# Altium PCB 十六路输入.PcbDoc (part 1 of 3)
Units mm, origin at the board's own origin, x right, y up, seen from the top; angles counter-clockwise.
Board outline 122.4 x 87.4 mm, 2 copper layers (Top Layer, Bottom Layer); 111 components, 112 nets, 343 pads, 40 vias.
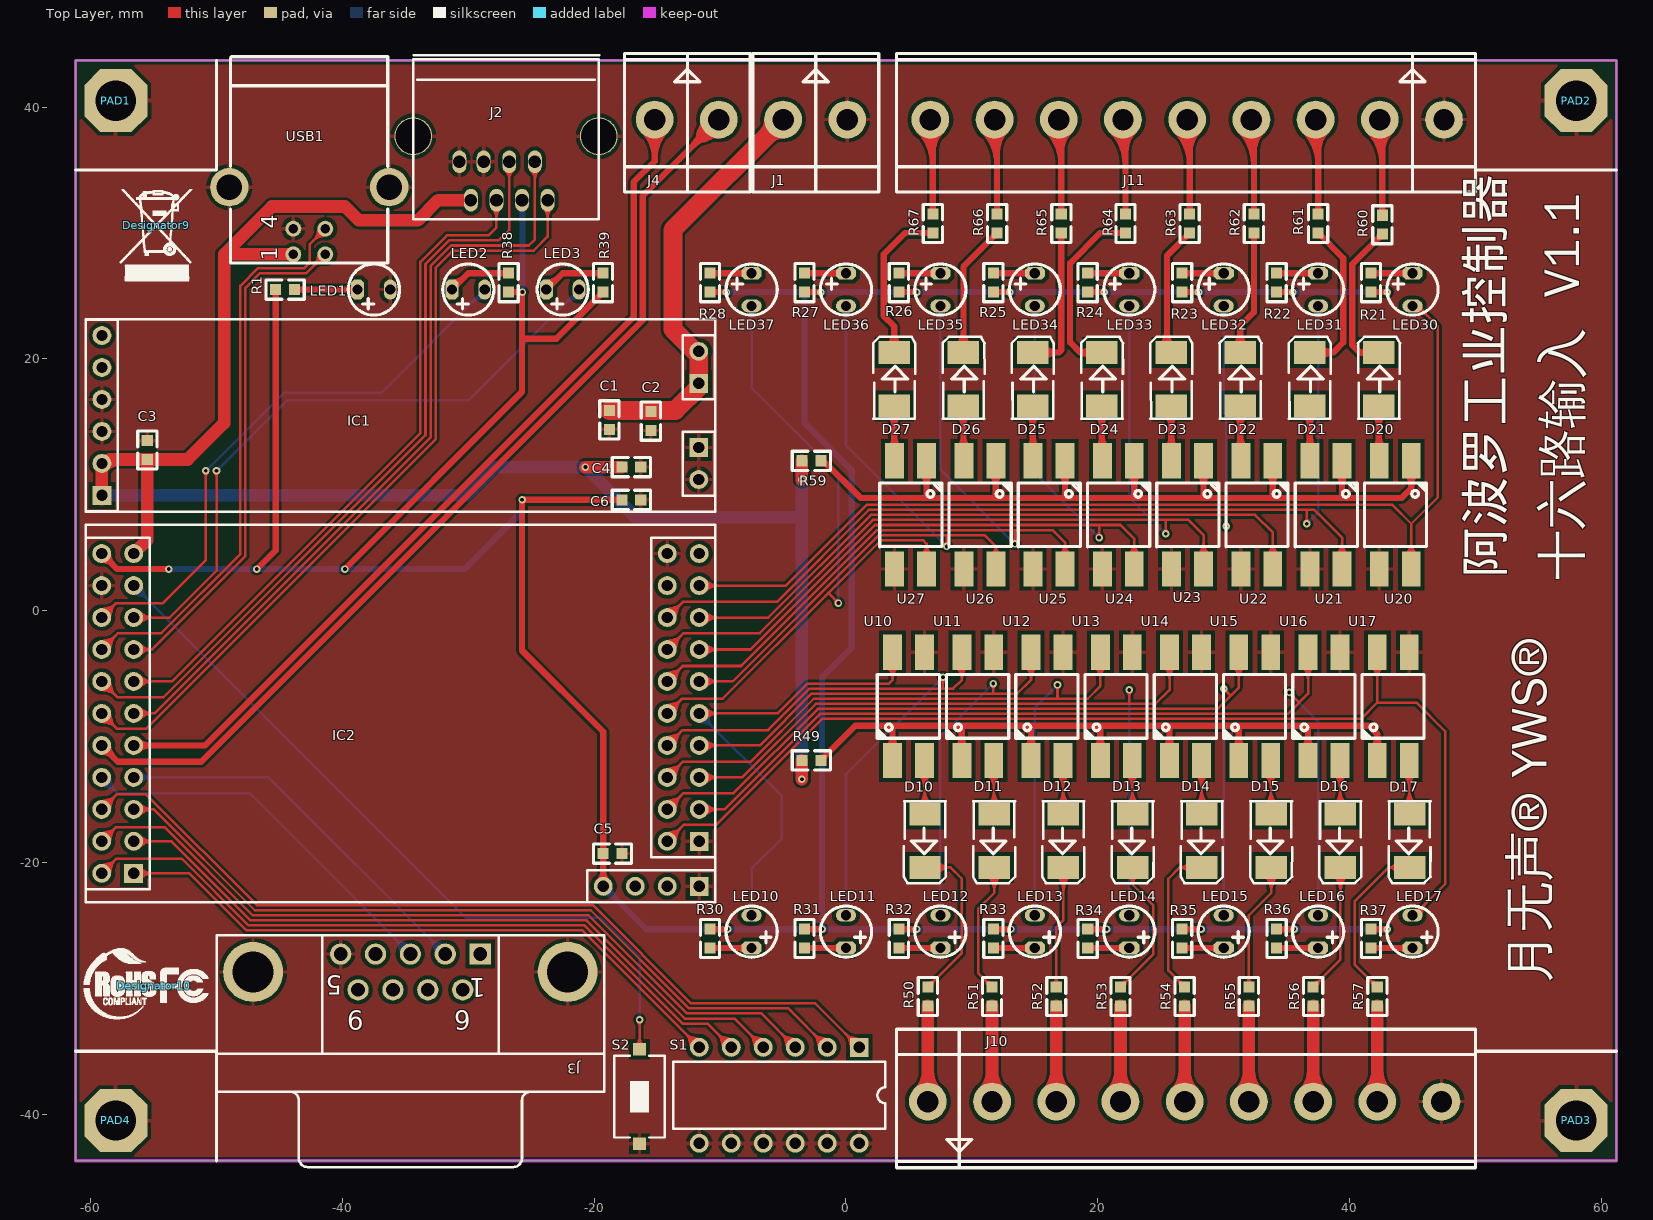
[diagram p0: Top Layer view]
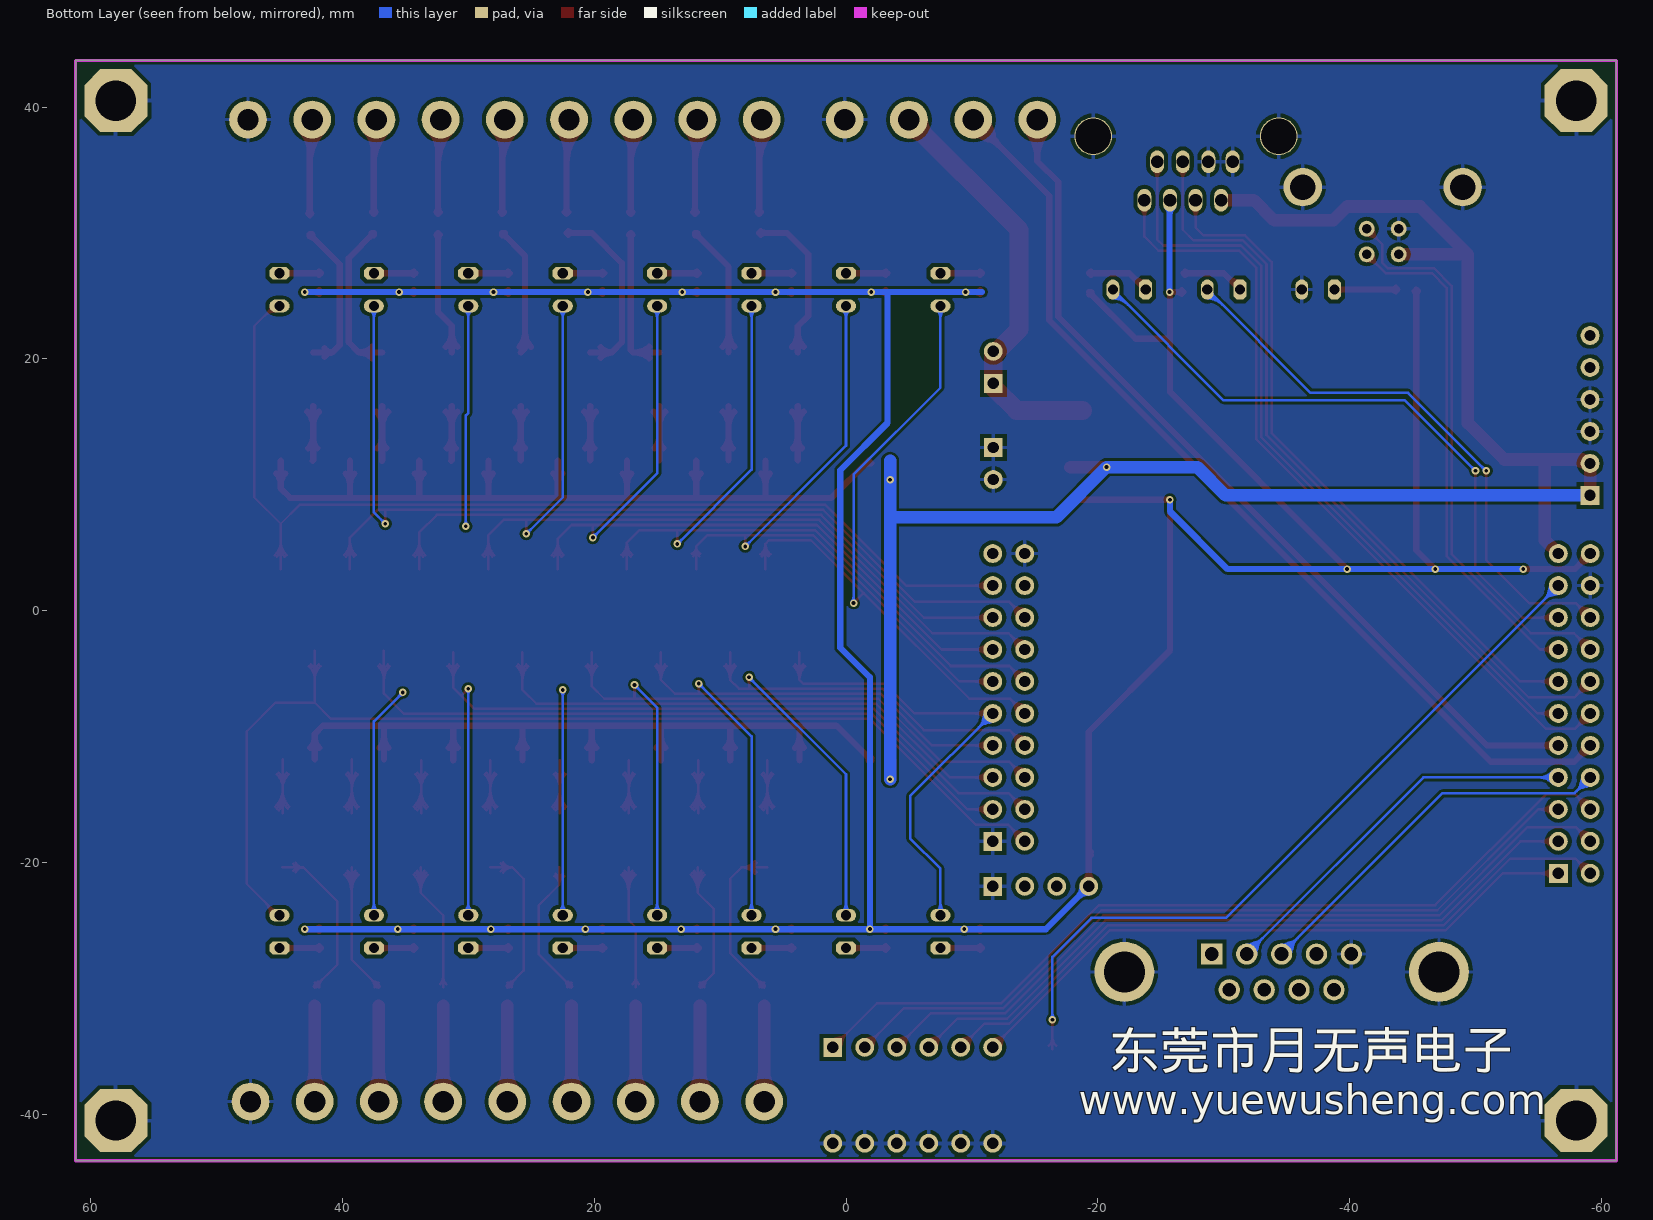
[diagram p1: Bottom Layer view, seen from below]

## Layer stack, top to bottom
Top Layer: signal copper 0.0356
Dielectric: dielectric 0.32, FR-4, Dk 4.8
Bottom Layer: signal copper 0.0356

## Board outline
-61.2,-43.7 61.2,-43.7 61.2,43.7 -61.2,43.7

## Design rules (kind name [scope] priority, off if disabled: settings)
Clearance [(InPadClass('All Pads')) vs InPolygon] p1: gap=0.3
Clearance Clearance_1 [All] p2: gap=0.2
ComponentClearance [All] p1 off: gap=0.254 collisioncheckmode=3 verticalgap=0.254 showdistances=FALSE
PlaneConnect [All] p1: planeconnectstyle=Relief reliefexpansion=0 reliefentries=4 reliefconductorwidth=0.3 reliefairgap=0.508
PolygonConnect PolygonConnect_1 [All vs IsComponentPad] p1: connectstyle=Relief reliefconductorwidth=0.3 reliefentries=4 polygonreliefangle="90 Angle" airgapwidth=0.3
PolygonConnect [All] p2: connectstyle=Direct reliefconductorwidth=0.3 reliefentries=4 polygonreliefangle="90 Angle" airgapwidth=0.3
RoomDefinition 2、十六路输入 [InComponentClass('2、十六路输入')] p1: confinementstyle=ConfineIn formatcopy=TRUE lockcomponents=FALSE outline -12,23.5 -12,28 3.5,28 3.5,46.6 62,46.6 62,-46.8 3.5,-46.8 3.5,-28 -12,-28 -12,-23.5 -9,-23.5 -9,23.5
RoomDefinition 公共电路 [InComponentClass('公共电路')] p2: confinementstyle=ConfineIn formatcopy=TRUE lockcomponents=FALSE outline -62,-44.5 3.5,-44.5 3.5,-43.7 61.2,-43.7 61.2,43.7 50,43.7 50,35 61.2,35 61.2,-35 50,-35 50,-43.7 3.5,-43.7 3.5,-28 -12,-28 -12,-23.5 -9.5,-23.5 -9.5,23.5 -12,23.5 -12,28 3.5,28 3.5,44.5 -62,44.5
RoutingVias [All] p1: holewidth=0.3 width=0.6 viastyle="Through Hole" minholewidth=0.3 minwidth=0.6 maxholewidth=0.3 maxwidth=0.6
SolderMaskExpansion [All] p1: expansion=0.102
Width [All] p1: maxlimit=2 minlimit=0.16 preferedwidth=0.2 minimp=50.000000 maximp=50.000000 favimp=50.000000
26 further rules are at their usual default settings.

## Classes and differential pairs
component class 2、十六路输入: D10 D11 D12 D13 D14 D15 D16 D17 D20 D21 D22 D23 D24 D25 D26 D27 J10 J11 LED10 LED11 LED12 LED13 LED14 LED15 LED16 LED17 LED30 LED31 LED32 LED33 LED34 LED35 LED36 LED37 R21 R22 R23 R24 R25 R26 R27 R28 R30 R31 R32 R33 R34 R35 R36 R37 R49 R50 R51 R52 R53 R54 R55 R56 R57 R59 R60 R61 R62 R63 R64 R65 R66 R67 U10 U11 U12 U13 U14 U15 U16 U17 U20 U21 U22 U23 U24 U25 U26 U27
component class 公共电路: C1 C2 C3 C4 C5 C6 Designator9 Designator10 IC1 IC2 J1 J2 J3 J4 LED1 LED2 LED3 PAD1 PAD2 PAD3 PAD4 R1 R38 R39 S1 S2 usb1

## Components (designator, comment, footprint, x,y, rotation, side; value= is the part's Value field where it differs from the comment)
C1 "104" 0603A -18.8,15.9 r270 top
C2 "104" 0603A -15.5,15.8 r270 top
C3 "104" 0603A -55.5,12 r90 top
C4 "104" 0603A -17.8,11.4 r0 top
C5 "104" 0603A -19.3,-19.3 r0 top
C6 "104" 0603A -17.8,8.8 r0 top
D10 "4148" 贴片二极管 6.2,-21.7 r270 top
D11 "4148" 贴片二极管 11.7,-21.7 r270 top
D12 "4148" 贴片二极管 17.2,-21.7 r270 top
D13 "4148" 贴片二极管 22.7,-21.7 r270 top
D14 "4148" 贴片二极管 28.2,-21.7 r270 top
D15 "4148" 贴片二极管 33.7,-21.7 r270 top
D16 "4148" 贴片二极管 39.2,-21.7 r270 top
D17 "4148" 贴片二极管 44.7,-21.7 r270 top
D20 "4148" 贴片二极管 42.4,21.8 r90 top
D21 "4148" 贴片二极管 36.9,21.8 r90 top
D22 "4148" 贴片二极管 31.4,21.8 r90 top
D23 "4148" 贴片二极管 25.9,21.8 r90 top
D24 "4148" 贴片二极管 20.4,21.8 r90 top
D25 "4148" 贴片二极管 14.9,21.8 r90 top
D26 "4148" 贴片二极管 9.4,21.8 r90 top
D27 "4148" 贴片二极管 3.9,21.8 r90 top
Designator9 "" HS -54.8,30.6 r0 top
Designator10 "" fc -55,-29.8 r0 top
IC1 "扩展模块电源板" 扩展模块电源板 -35.4,15.5 r180 top
IC2 "扩展模块核心板" 扩展模块核心板 -35.4,-8.2 r0 top
J1 "CON2" CON2*5.1 0.1,39 r0 top
J2 "CON8" "od-rj45 - duplicate" -23.7,32.6 r180 top
J3 "D Connector 9" DSUB1.385-2H9 -34.6,-38.2 r180 top
J4 "CON2" CON2*5.1 -10.1,39 r0 top
J10 "CON9" CON9*5.1 6.5,-39 r180 top
J11 "CON9" CON9*5.1 47.5,39 r0 top
LED1 "LED" LED2.5 -37.5,25.5 r180 top
LED2 "LED" LED2.5 -30,25.5 r180 top
LED3 "LED" LED2.5 -22.5,25.5 r180 top
LED10 "LED" LED2.5 -7.5,-25.5 r270 top (schematic designator LED18)
LED11 "LED" LED2.5 0,-25.5 r270 top
LED12 "LED" LED2.5 7.5,-25.5 r270 top
LED13 "LED" LED2.5 15,-25.5 r270 top
LED14 "LED" LED2.5 22.5,-25.5 r270 top
LED15 "LED" LED2.5 30,-25.5 r270 top
LED16 "LED" LED2.5 37.5,-25.5 r270 top
LED17 "LED" LED2.5 45,-25.5 r270 top
LED30 "LED" LED2.5 45,25.5 r90 top
LED31 "LED" LED2.5 37.5,25.5 r90 top
LED32 "LED" LED2.5 30,25.5 r90 top
LED33 "LED" LED2.5 22.5,25.5 r90 top
LED34 "LED" LED2.5 15,25.5 r90 top
LED35 "LED" LED2.5 7.5,25.5 r90 top
LED36 "LED" LED2.5 0,25.5 r90 top
LED37 "LED" LED2.5 -7.5,25.5 r90 top
PAD1 "PAD" PAD -58,40.5 r0 top
PAD2 "PAD" PAD 58,40.5 r0 top
PAD3 "PAD" PAD 58,-40.5 r0 top
PAD4 "PAD" PAD -58,-40.5 r0 top
R1 "160" 0603A -45.3,25.5 r0 top
R21 "160R" 0603A 41.7,25.3 r90 top
R22 "160R" 0603A 34.2,25.3 r90 top
R23 "160R" 0603A 26.7,25.3 r90 top
R24 "160R" 0603A 19.2,25.3 r90 top
R25 "160R" 0603A 11.7,25.3 r90 top
R26 "160R" 0603A 4.2,25.3 r90 top
R27 "160R" 0603A -3.3,25.3 r90 top
R28 "160R" 0603A -10.8,25.3 r90 top
R30 "160R" 0603A -10.8,-25.3 r270 top
R31 "160R" 0603A -3.3,-25.3 r270 top
R32 "160R" 0603A 4.2,-25.3 r270 top
R33 "160R" 0603A 11.7,-25.3 r270 top
R34 "160R" 0603A 19.2,-25.3 r270 top
R35 "160R" 0603A 26.7,-25.3 r270 top
R36 "160R" 0603A 34.2,-25.3 r270 top
R37 "160R" 0603A 41.7,-25.3 r270 top
R38 "160" 0603A -26.8,25.3 r90 top
R39 "160" 0603A -19.3,25.3 r90 top
R49 "0" 0603A -2,-11.9 r180 top
R50 "160R" 0603A 6.5,-29.9 r270 top
R51 "160R" 0603A 11.6,-29.9 r270 top
R52 "160R" 0603A 16.7,-29.9 r270 top
R53 "160R" 0603A 21.8,-29.9 r270 top
R54 "160R" 0603A 26.9,-29.9 r270 top
R55 "160R" 0603A 32,-29.9 r270 top
R56 "160R" 0603A 37.1,-29.9 r270 top
R57 "160R" 0603A 42.2,-29.9 r270 top
R59 "0" 0603A -2,11.9 r180 top
R60 "160R" 0603A 42.6,29.9 r90 top
R61 "2.4k" 0603A 37.5,30 r90 top
R62 "160R" 0603A 32.4,30 r90 top
R63 "160R" 0603A 27.3,30 r90 top
R64 "160R" 0603A 22.2,30 r90 top
R65 "160R" 0603A 17.1,30 r90 top
R66 "160R" 0603A 12,30 r90 top
R67 "160R" 0603A 6.9,30 r90 top
S1 "SW DIP-6" DIP-12/SW -5.3,-38.5 r180 top
S2 "RESRT" SW-PB2 -16.4,-38.6 r270 top
U10 "TLP521-1" PC817 3.7,-11.6 r90 top
U11 "TLP521-1" PC817 9.2,-11.6 r90 top
U12 "TLP521-1" PC817 14.7,-11.6 r90 top
U13 "TLP521-1" PC817 20.2,-11.6 r90 top
U14 "TLP521-1" PC817 25.7,-11.6 r90 top
U15 "TLP521-1" PC817 31.2,-11.6 r90 top
U16 "TLP521-1" PC817 36.7,-11.6 r90 top
U17 "TLP521-1" PC817 42.2,-11.6 r90 top
U20 "TLP521-1" PC817 44.9,11.6 r270 top
U21 "TLP521-1" PC817 39.4,11.6 r270 top
U22 "TLP521-1" PC817 33.9,11.6 r270 top
U23 "TLP521-1" PC817 28.4,11.6 r270 top
U24 "TLP521-1" PC817 22.9,11.6 r270 top
U25 "TLP521-1" PC817 17.4,11.6 r270 top
U26 "TLP521-1" PC817 11.9,11.6 r270 top
U27 "TLP521-1" PC817 6.4,11.6 r270 top
USB1 "USB" USB-B3 -43.9,28.3 r90 top

## Footprints (in the part's own frame and the unit in brackets; to place one, negate y for a bottom-side part, rotate by r counter-clockwise, add the part's x,y. Pads: shape width x height; smd on the part's side, far side on the other; paste and mask are expansions set on the pad)
0603A [mm]
  rect 0.88x0.88 smd: 1(0,0) 2(1.5,0)
  silkscreen extent -0.76,-0.76 2.26,0.76
CON2*5.1 [mm]
  round 3 hole 1.7: 1(0,0) 2(-5.1,0)
  silkscreen extent -7.5,-5.75 2.5,5.25
CON9*5.1 [mm]
  round 3 hole 1.7: 1(0,0) 2(-5.1,0) 3(-10.2,0) 4(-15.3,0) 5(-20.4,0) 6(-25.5,0) 7(-30.6,0) 8(-35.7,0) 9(-40.8,0)
  silkscreen extent -43.5,-5.75 2.5,5.25
DIP-12/SW [mm] "DIP Switch; 12 Leads"
  rect 1.5x1.5 hole 0.9: 1(-6.35,-3.81)
  round 1.5 hole 0.9: 2(-3.81,-3.81) 3(-1.27,-3.81) 4(1.27,-3.81) 5(3.81,-3.81) 6(6.35,-3.81) 7(6.35,3.81) 8(3.81,3.81) 9(1.27,3.81) 10(-1.27,3.81) 11(-3.81,3.81) 12(-6.35,3.81)
  silkscreen extent -8.43,-2.65 8.41,2.65
DSUB1.385-2H9 [mm] "Connector; D Subminiature; 9 Position; Right Angle; Pitch 1.385 mm"
  rect 1.69x1.69 hole 1.09: 1(-5.54,-10.92)
  round 1.69 hole 1.09: 2(-2.77,-10.92) 3(0,-10.92) 4(2.77,-10.92) 5(5.54,-10.92) 6(-4.155,-8.08) 7(-1.385,-8.08) 8(1.385,-8.08) 9(4.155,-8.08)
  round 4.76 hole 3.26: 10(-12.495,-9.5) 11(12.495,-9.5)
  silkscreen extent -15.4,-12.4 15.4,6
fc [mm]
  silkscreen extent -5.53,-2.62 4.36,3
HS [mm]
  silkscreen extent -2.87,-4.39 2.87,2.87
LED2.5 [mil]
  oct 40x63 hole 32: A(51.18,0)
  oval 40x63 hole 32: K(-51.18,0)
  silkscreen extent -80,-80 80,80
"od-rj45 - duplicate" [mm]
  oval 1.1x1.8 hole 1: 1(0,0) 2(1.016,-3.048) 3(2.032,0) 4(3.048,-3.048) 5(4.064,0) 6(5.08,-3.048) 7(6.096,0) 8(7.012,-3.048)
  round 3 hole 2.8: 8(-4.064,-5.08) 8(10.668,-5.08)
  silkscreen extent -4.1,-11.53 10.67,1.52
PAD [mm]
  oct 5x5 hole 3.2: 1(0,0)
PC817 [mm]
  rect 2.8x1.5 smd: 1(-0.3,0) 2(-0.3,-2.54) 3(8.3,-2.54) 4(8.3,0)
  silkscreen extent 1.46,-3.72 6.53,1.22
SW-PB2 [mm]
  rect 1x1 smd: 1(-3.75,0) 2(3.75,0)
  silkscreen extent -3.25,-2 3.25,2
USB-B3 [mil]
  round 50 hole 30: 1(0,0) 2(0,-100) 3(80,-100) 4(80,0)
  round 120 hole 80: 5(210,200) 6(210,-300)
  silkscreen extent -28,-295 618,197
扩展模块核心板 [mm]
  rect 1.5x1.5 hole 0.9: 1(-21.18,-12.67) 42(23.74,-10.13) 43(23.74,-13.7)
  round 1.5 hole 0.9: 2(-23.72,-12.67) 3(-21.18,-10.13) 4(-23.72,-10.13) 5(-21.18,-7.59) 6(-23.72,-7.59) 7(-21.18,-5.05) 8(-23.72,-5.05) 9(-21.18,-2.51) 10(-23.72,-2.51) 11(-21.18,0.03) 12(-23.72,0.03) 13(-21.18,2.57) 14(-23.72,2.57) 15(-21.18,5.11) 16(-23.72,5.11) 17(-21.18,7.65) 18(-23.72,7.65) 19(-21.18,10.19) 20(-23.72,10.19) 21(-21.18,12.73) 22(-23.72,12.73) 23(21.2,12.73) 24(23.74,12.73) 25(21.2,10.19) 26(23.74,10.19) 27(21.2,7.65) 28(23.74,7.65) 29(21.2,5.11) 30(23.74,5.11) 31(21.2,2.57) 32(23.74,2.57) 33(21.2,0.03) 34(23.74,0.03) 35(21.2,-2.51) 36(23.74,-2.51) 37(21.2,-5.05) 38(23.74,-5.05) 39(21.2,-7.59) 40(23.74,-7.59) 41(21.2,-10.13) 44(21.2,-13.7) 45(18.66,-13.7) 46(16.12,-13.7)
  silkscreen extent -24.99,-14.97 25.01,15.03
扩展模块电源板 [mm]
  round 1.5 hole 0.9: 1(-23.7,-5.09) 2(-23.7,5.09) 3(23.7,3.81) 4(23.7,-1.27) 4(23.7,1.27) 5(23.7,-6.35) 5(23.7,-3.81)
  rect 1.5x1.5 hole 0.9: 1(-23.7,-2.55) 2(-23.7,2.55) 3(23.7,6.35)
  silkscreen extent -25,-7.65 25,7.65
贴片二极管 [mm]
  rect 1.8x2.5 smd: A(-5.55,0.075) K(-1.3,0.075)
  silkscreen extent -6.58,-1.61 -0.05,1.73

## Part data
C1 C2 C3 C4 C5 C6: library part CAP, "Capacitor"
D10 D11 D12 D13 D14 D15 D16 D17 D20 D21 D22 D23 D24 D25 D26 D27: library part 二极管
Designator9 Designator10: library part PAD
J3: "Receptacle Assembly, 9 Position, Right Angle"
R1 R38 R39: library part RES2
R21 R22 R23 R24 R25 R26 R27 R28 R30 R31 R32 R33 R34 R35 R36 R37 R49 R50 R51 R52 R53 R54 R55 R56 R57 R59 R60 R61 R62 R63 R64 R65 R66 R67: library part Res2, "Resistor"
S1: "DIP Switch, 6 Position, SPST"
S2: library part SW-PB
U10 U11 U12 U13 U14 U15 U16 U17 U20 U21 U22 U23 U24 U25 U26 U27: "Single NPN PhotoTransistor OptoCoupler."
USB1: library part "HEADER 3X2"

## Via types
v1: diameter 0.6, hole 0.3, Top Layer to Bottom Layer, 40 vias

## Nets (pads, with @x,y where several pads share a name; then routed paths per layer and width w, separated by ;. In a path a pad name is that pad's centre, name@x,y a point inside that pad or via, vN(x,y) a via of type N, cw(c..) or ccw(c..) an arc to the next point about the centre after c; other vN are vias at no path point)
485A: IC2.10 J4.1 | length 102
  Top Layer w0.5: IC2.10@-59.12,-10.41 IC2.10@-58.97,-10.56 ; -58.49,-11.379 cw(c-58.264,-10.535) IC2.10@-59.12,-10.71 ; -58.451,-11.34 ccw(c-59.295,-11.566) IC2.10@-59.12,-10.71 ; -11.667,37.816 cw(c-9.752,37.303) J4.1@-10.15,39.245 ; -11.284,37.433 ccw(c-11.797,39.348) J4.1@-9.855,38.95 ; J4.1@-10.1,39 -16.15,32.95 -16.15,23.06 -51.21,-12 -57.83,-12 IC2.10@-59.12,-10.71 ; -58.266,-11.564 cw(c-57.413,-10.71) -58.62,-10.71 ccw(c-57.413,-10.71) -58.266,-11.564 ; -58.266,-11.564 ccw(c-59.12,-12.417) -59.12,-11.21 cw(c-59.12,-12.417) -58.266,-11.564 ; -12.234,36.866 cw(c-10.1,34.732) -10.1,37.75 ccw(c-10.1,34.732) -12.234,36.866 ; -12.234,36.866 ccw(c-14.368,39) -11.35,39 cw(c-14.368,39) -12.234,36.866 ; -11.38,37.72 cw(c-10.1,36.439) -10.1,38.25 ccw(c-10.1,36.439) -11.38,37.72 ; -11.38,37.72 ccw(c-12.661,39) -10.85,39 cw(c-12.661,39) -11.38,37.72
485B: IC2.9 J4.2 | length 89.1
  Top Layer w0.5: IC2.9@-56.58,-10.71 -50.91,-10.71 -16.85,23.35 -16.85,34.05 -15.2,35.7 J4.2@-15.2,39 ; -55.373,-10.71 cw(c-55.373,-9.503) -56.226,-10.356 ccw(c-55.373,-9.503) -55.373,-10.71 ; -55.373,-10.71 ccw(c-55.373,-11.917) -56.226,-11.064 cw(c-55.373,-11.917) -55.373,-10.71 ; -15.2,35.982 cw(c-12.182,35.982) -14.316,38.116 ccw(c-12.182,35.982) -15.2,35.982 ; -15.2,35.982 ccw(c-18.218,35.982) -16.084,38.116 cw(c-18.218,35.982) -15.2,35.982 ; -15.2,37.189 cw(c-13.389,37.189) -14.67,38.47 ccw(c-13.389,37.189) -15.2,37.189 ; -15.2,37.189 ccw(c-17.011,37.189) -15.73,38.47 cw(c-17.011,37.189) -15.2,37.189
+3.3V: C5.1 C6.1 IC2.22 IC2.46 J2.3 R1.1 R21.1 R22.1 R23.1 R24.1 R25.1 R26.1 R27.1 R28.1 R30.1 R31.1 R32.1 R33.1 R34.1 R35.1 R36.1 R37.1 R38.1 R39.1 | length 371.5
  Top Layer w0.5: IC2.22@-59.12,4.83 IC2.22@-58.97,4.68 ; -58.49,3.861 cw(c-58.264,4.705) IC2.22@-59.12,4.53 ; -58.451,3.9 ccw(c-59.295,3.674) IC2.22@-59.12,4.53 ; v1(-53.8,3.3) -57.89,3.3 IC2.22@-59.12,4.53 ; v1(-46.8,3.3) -45.3,4.8 R1.1@-45.3,25.5 ; v1(-39.8,3.3) -25.732,17.368 -25.732,21.6 ; R38.1@-26.8,25.3 v1(-25.7,25.3) -25.732,25.268 -25.732,21.6 ; R39.1@-19.49,25.3 cw(c-19.949,25.3) -19.624,24.976 cw(c-19.3,24.651) R39.1@-19.3,25.11 ; R39.1@-19.3,25.3 -23,21.6 -25.732,21.6 ; IC2.46@-19.28,-21.9 -19.28,-9.62 -25.732,-3.168 v1(-25.732,8.8) C6.1@-17.8,8.8 ; R30.1@-10.8,-25.3 v1(-9.4,-25.3) ; R28.1@-10.8,25.3 v1(-9.5,25.3) ; R30.1@-10.666,-25.434 cw(c-10.341,-25.759) -10.341,-25.3 cw(c-10.341,-24.841) R30.1@-10.666,-25.166 ; R28.1@-10.666,25.166 cw(c-10.341,24.841) -10.341,25.3 cw(c-10.341,25.759) R28.1@-10.666,25.434 ; R31.1@-3.3,-25.3 v1(-1.9,-25.3) ; R27.1@-3.3,25.3 v1(-2,25.3) ; R31.1@-3.166,-25.434 cw(c-2.841,-25.759) -2.841,-25.3 cw(c-2.841,-24.841) R31.1@-3.166,-25.166 ; R27.1@-3.166,25.166 cw(c-2.841,24.841) -2.841,25.3 cw(c-2.841,25.759) R27.1@-3.166,25.434 ; R32.1@4.2,-25.3 v1(5.6,-25.3) ; R26.1@4.2,25.3 v1(5.6,25.3) ; R32.1@4.334,-25.434 cw(c4.659,-25.759) 4.659,-25.3 cw(c4.659,-24.841) R32.1@4.334,-25.166 ; R26.1@4.334,25.166 cw(c4.659,24.841) 4.659,25.3 cw(c4.659,25.759) R26.1@4.334,25.434 ; R33.1@11.7,-25.3 v1(13.1,-25.3) ; R25.1@11.7,25.3 v1(13,25.3) ; R33.1@11.834,-25.434 cw(c12.159,-25.759) 12.159,-25.3 cw(c12.159,-24.841) R33.1@11.834,-25.166 ; R25.1@11.834,25.166 cw(c12.159,24.841) 12.159,25.3 cw(c12.159,25.759) R25.1@11.834,25.434 ; R34.1@19.2,-25.3 v1(20.7,-25.3) ; R24.1@19.2,25.3 v1(20.5,25.3) ; R34.1@19.334,-25.434 cw(c19.659,-25.759) 19.659,-25.3 cw(c19.659,-24.841) R34.1@19.334,-25.166 ; R24.1@19.334,25.166 cw(c19.659,24.841) 19.659,25.3 cw(c19.659,25.759) R24.1@19.334,25.434 ; R35.1@26.7,-25.3 v1(28.2,-25.3) ; R23.1@26.7,25.3 v1(28,25.3) ; R35.1@26.834,-25.434 cw(c27.159,-25.759) 27.159,-25.3 cw(c27.159,-24.841) R35.1@26.834,-25.166 ; R23.1@26.834,25.166 cw(c27.159,24.841) 27.159,25.3 cw(c27.159,25.759) R23.1@26.834,25.434 ; R36.1@34.2,-25.3 v1(35.6,-25.3) ; R22.1@34.2,25.3 v1(35.5,25.3) ; R36.1@34.334,-25.434 cw(c34.659,-25.759) 34.659,-25.3 cw(c34.659,-24.841) R36.1@34.334,-25.166 ; R22.1@34.334,25.166 cw(c34.659,24.841) 34.659,25.3 cw(c34.659,25.759) R22.1@34.334,25.434 ; R37.1@41.7,-25.3 v1(43,-25.3) ; R21.1@41.7,25.3 v1(43,25.3) ; R37.1@41.834,-25.434 cw(c42.159,-25.759) 42.159,-25.3 cw(c42.159,-24.841) R37.1@41.834,-25.166 ; R21.1@41.834,25.166 cw(c42.159,24.841) 42.159,25.3 cw(c42.159,25.759) R21.1@41.834,25.434 ; -58.266,3.676 cw(c-57.413,4.53) -58.62,4.53 ccw(c-57.413,4.53) -58.266,3.676 ; -58.266,3.676 ccw(c-59.12,2.823) -59.12,4.03 cw(c-59.12,2.823) -58.266,3.676 ; -45.3,25.041 cw(c-44.841,25.041) -45.166,25.366 ccw(c-44.841,25.041) -45.3,25.041 ; -45.3,25.041 ccw(c-45.759,25.041) -45.434,25.366 cw(c-45.759,25.041) -45.3,25.041 ; -26.341,25.3 cw(c-26.341,25.759) -26.666,25.434 ccw(c-26.341,25.759) -26.341,25.3 ; -26.341,25.3 ccw(c-26.341,24.841) -26.666,25.166 cw(c-26.341,24.841) -26.341,25.3 ; -19.28,-20.693 cw(c-20.487,-20.693) -19.634,-21.546 ccw(c-20.487,-20.693) -19.28,-20.693 ; -19.28,-20.693 ccw(c-18.073,-20.693) -18.926,-21.546 cw(c-18.073,-20.693) -19.28,-20.693 ; -18.259,8.8 cw(c-18.259,8.341) -17.934,8.666 ccw(c-18.259,8.341) -18.259,8.8 ; -18.259,8.8 ccw(c-18.259,9.259) -17.934,8.934 cw(c-18.259,9.259) -18.259,8.8 ; C5.1@-19.434,-19.434 cw(c-19.807,-19.807) -19.28,-19.807 ccw(c-19.807,-19.807) C5.1@-19.434,-19.434 ; C5.1@-19.434,-19.166 ccw(c-19.807,-18.793) -19.28,-18.793 cw(c-19.807,-18.793) C5.1@-19.434,-19.166
  Bottom Layer w0.5: v1(-53.8,3.3) v1(-46.8,3.3) v1(-39.8,3.3) -30.3,3.3 -25.732,7.868 v1(-25.732,8.8) ; J2.3@-25.732,32.6 -25.7,32.568 v1(-25.7,25.3) ; IC2.46@-19.28,-21.9 -15.88,-25.3 -10.8,-25.3 -3.3,-25.3 v1(-1.9,-25.3) ; -10.8,25.3 v1(-9.5,25.3) -3.3,25.3 ; v1(43,-25.3) 34.2,-25.3 26.7,-25.3 19.2,-25.3 11.7,-25.3 4.2,-25.3 v1(-1.9,-25.3) ; v1(43,25.3) v1(35.5,25.3) v1(28,25.3) v1(20.5,25.3) v1(13,25.3) v1(5.6,25.3) v1(-2,25.3) -3.3,25.3 ; -18.426,-22.754 cw(c-17.573,-21.9) -18.78,-21.9 ccw(c-17.573,-21.9) -18.426,-22.754 ; -18.426,-22.754 ccw(c-19.28,-23.607) -19.28,-22.4 cw(c-19.28,-23.607) -18.426,-22.754 ; -3.3,25.3 -3.3,14.9 0.45,11.15 0.45,-2.95 -1.9,-5.3 v1(-1.9,-25.3) ; J2.3@-25.944,32.038 cw(c-26.534,31.448) -25.7,31.448 ccw(c-26.534,31.448) J2.3@-25.944,32.038 ; -25.7,31.603 cw(c-25.085,31.603) -25.52,32.038 ccw(c-25.085,31.603) -25.7,31.603
+5V: C3.1 C4.1 IC1.3 IC2.21 J2.7 R49.2 R59.2 USB1.1 | length 155.5
  Top Layer w1: IC1.3@-59.1,8.85 IC1.3@-59.1,9.15 -59.1,11.39 -58.49,12 C3.1@-55.5,12 ; IC1.3@-58.96,11.897 ccw(c-58.611,12.414) -58.299,11.874 ; IC2.21@-56.58,4.53 -55.5,5.61 C3.1@-55.5,12 ; USB1.1@-43.9,28.3 -49.4,28.3 ; J2.7@-29.796,32.6 -32.4,32.6 -34,31 -38.7,31 -39.8,32.1 -45.6,32.1 -49.4,28.3 ; v1(-20.7,11.4) C4.1@-17.8,11.4 ; v1(-3.5,-13.4) R49.2@-3.5,-11.9 ; v1(-3.5,10.4) R59.2@-3.5,11.9 ; C3.1@-55.5,12 -52.3,12 -49.4,14.9 -49.4,28.3 ; IC1.3@-58.923,11.513 cw(c-57.748,10.338) -57.748,12 ccw(c-57.748,10.338) IC1.3@-58.923,11.513
  Bottom Layer w1: IC1.3@-59.1,9.15 -30.15,9.15 -27.9,11.4 v1(-20.7,11.4) -16.7,7.4 -3.5,7.4 ; v1(-3.5,-13.4) -3.5,7.4 ; -3.5,11.9 v1(-3.5,10.4) -3.5,7.4
GND: C1.2 C2.2 C3.2 C4.2 C5.2 C6.2 IC1.2 IC1.4 IC2.20 IC2.23 IC2.42 IC2.43 J1.1 J2.6 J2.8 J3.5 J3.10 J3.11 J10.9 J11.1 LED1.K PAD1.1 PAD2.1 PAD3.1 PAD4.1 S1.7 S1.8 S1.9 S1.10 S1.11 S1.12 S2.2 U10.3 U11.3 U12.3 U13.3 U14.3 U15.3 U16.3 U17.3 U20.3 U21.3 U22.3 U23.3 U24.3 U25.3 U26.3 U27.3 USB1.4 USB1.5 USB1.6
INPUT1: J10.1 R50.2 | length 15.2
  Top Layer w1: J10.1@6.5,-39 R50.2@6.5,-31.4 ; 6.5,-36.586 cw(c4.086,-36.586) 5.793,-38.293 ccw(c4.086,-36.586) 6.5,-36.586 ; 6.5,-36.586 ccw(c8.914,-36.586) 7.207,-38.293 cw(c8.914,-36.586) 6.5,-36.586
INPUT2: J10.2 R51.2 | length 15.2
  Top Layer w1: J10.2@11.6,-39 R51.2@11.6,-31.4 ; 11.6,-36.586 cw(c9.186,-36.586) 10.893,-38.293 ccw(c9.186,-36.586) 11.6,-36.586 ; 11.6,-36.586 ccw(c14.014,-36.586) 12.307,-38.293 cw(c14.014,-36.586) 11.6,-36.586
INPUT3: J10.3 R52.2 | length 15.2
  Top Layer w1: J10.3@16.7,-39 R52.2@16.7,-31.4 ; 16.7,-36.586 cw(c14.286,-36.586) 15.993,-38.293 ccw(c14.286,-36.586) 16.7,-36.586 ; 16.7,-36.586 ccw(c19.114,-36.586) 17.407,-38.293 cw(c19.114,-36.586) 16.7,-36.586
INPUT4: J10.4 R53.2 | length 15.2
  Top Layer w1: J10.4@21.8,-39 R53.2@21.8,-31.4 ; 21.8,-36.586 cw(c19.386,-36.586) 21.093,-38.293 ccw(c19.386,-36.586) 21.8,-36.586 ; 21.8,-36.586 ccw(c24.214,-36.586) 22.507,-38.293 cw(c24.214,-36.586) 21.8,-36.586
INPUT5: J10.5 R54.2 | length 15.2
  Top Layer w1: J10.5@26.9,-39 R54.2@26.9,-31.4 ; 26.9,-36.586 cw(c24.486,-36.586) 26.193,-38.293 ccw(c24.486,-36.586) 26.9,-36.586 ; 26.9,-36.586 ccw(c29.314,-36.586) 27.607,-38.293 cw(c29.314,-36.586) 26.9,-36.586
INPUT6: J10.6 R55.2 | length 15.2
  Top Layer w1: J10.6@32,-39 R55.2@32,-31.4 ; 32,-36.586 cw(c29.586,-36.586) 31.293,-38.293 ccw(c29.586,-36.586) 32,-36.586 ; 32,-36.586 ccw(c34.414,-36.586) 32.707,-38.293 cw(c34.414,-36.586) 32,-36.586
INPUT7: J10.7 R56.2 | length 15.2
  Top Layer w1: J10.7@37.1,-39 R56.2@37.1,-31.4 ; 37.1,-36.586 cw(c34.686,-36.586) 36.393,-38.293 ccw(c34.686,-36.586) 37.1,-36.586 ; 37.1,-36.586 ccw(c39.514,-36.586) 37.807,-38.293 cw(c39.514,-36.586) 37.1,-36.586
INPUT8: J10.8 R57.2 | length 15.2
  Top Layer w1: J10.8@42.2,-39 R57.2@42.2,-31.4 ; 42.2,-36.586 cw(c39.786,-36.586) 41.493,-38.293 ccw(c39.786,-36.586) 42.2,-36.586 ; 42.2,-36.586 ccw(c44.614,-36.586) 42.907,-38.293 cw(c44.614,-36.586) 42.2,-36.586
INPUT9: J11.2 R60.2 | length 22.5
  Top Layer w0.5: R60.2@42.6,31.4 J11.2@42.6,39.1 ; 42.6,31.859 cw(c42.141,31.859) 42.466,31.534 ccw(c42.141,31.859) 42.6,31.859 ; 42.6,31.859 ccw(c43.059,31.859) 42.734,31.534 cw(c43.059,31.859) 42.6,31.859 ; J11.2@41.516,38.116 cw(c38.899,35.499) 42.6,35.499 ccw(c38.899,35.499) J11.2@41.516,38.116 ; J11.2@41.87,38.47 cw(c40.106,36.706) 42.6,36.706 ccw(c40.106,36.706) J11.2@41.87,38.47 ; 42.6,36.465 cw(c44.935,36.465) 43.284,38.116 ccw(c44.935,36.465) 42.6,36.465
INPUT10: J11.3 R61.2 | length 22.4
  Top Layer w0.5: R61.2@37.5,31.5 J11.3@37.5,39.1 ; 37.5,31.959 cw(c37.041,31.959) 37.366,31.634 ccw(c37.041,31.959) 37.5,31.959 ; 37.5,31.959 ccw(c37.959,31.959) 37.634,31.634 cw(c37.959,31.959) 37.5,31.959 ; J11.3@36.416,38.116 cw(c33.799,35.499) 37.5,35.499 ccw(c33.799,35.499) J11.3@36.416,38.116 ; J11.3@36.77,38.47 cw(c35.006,36.706) 37.5,36.706 ccw(c35.006,36.706) J11.3@36.77,38.47 ; 37.5,36.465 cw(c39.835,36.465) 38.184,38.116 ccw(c39.835,36.465) 37.5,36.465
INPUT11: J11.4 R62.2 | length 22.4
  Top Layer w0.5: R62.2@32.4,31.5 J11.4@32.4,39.1 ; 32.4,31.959 cw(c31.941,31.959) 32.266,31.634 ccw(c31.941,31.959) 32.4,31.959 ; 32.4,31.959 ccw(c32.859,31.959) 32.534,31.634 cw(c32.859,31.959) 32.4,31.959 ; J11.4@31.316,38.116 cw(c28.699,35.499) 32.4,35.499 ccw(c28.699,35.499) J11.4@31.316,38.116 ; J11.4@31.67,38.47 cw(c29.906,36.706) 32.4,36.706 ccw(c29.906,36.706) J11.4@31.67,38.47 ; 32.4,36.465 cw(c34.735,36.465) 33.084,38.116 ccw(c34.735,36.465) 32.4,36.465
INPUT12: J11.5 R63.2 | length 22.4
  Top Layer w0.5: R63.2@27.3,31.5 J11.5@27.3,39.1 ; 27.3,31.959 cw(c26.841,31.959) 27.166,31.634 ccw(c26.841,31.959) 27.3,31.959 ; 27.3,31.959 ccw(c27.759,31.959) 27.434,31.634 cw(c27.759,31.959) 27.3,31.959 ; J11.5@26.216,38.116 cw(c23.599,35.499) 27.3,35.499 ccw(c23.599,35.499) J11.5@26.216,38.116 ; J11.5@26.57,38.47 cw(c24.806,36.706) 27.3,36.706 ccw(c24.806,36.706) J11.5@26.57,38.47 ; 27.3,36.465 cw(c29.635,36.465) 27.984,38.116 ccw(c29.635,36.465) 27.3,36.465
INPUT13: J11.6 R64.2 | length 22.4
  Top Layer w0.5: R64.2@22.2,31.5 J11.6@22.2,39.1 ; 22.2,31.959 cw(c21.741,31.959) 22.066,31.634 ccw(c21.741,31.959) 22.2,31.959 ; 22.2,31.959 ccw(c22.659,31.959) 22.334,31.634 cw(c22.659,31.959) 22.2,31.959 ; J11.6@21.116,38.116 cw(c18.499,35.499) 22.2,35.499 ccw(c18.499,35.499) J11.6@21.116,38.116 ; J11.6@21.47,38.47 cw(c19.706,36.706) 22.2,36.706 ccw(c19.706,36.706) J11.6@21.47,38.47 ; 22.2,36.465 cw(c24.535,36.465) 22.884,38.116 ccw(c24.535,36.465) 22.2,36.465
INPUT14: J11.7 R65.2 | length 22.4
  Top Layer w0.5: R65.2@17.1,31.5 J11.7@17.1,39.1 ; 17.1,31.959 cw(c16.641,31.959) 16.966,31.634 ccw(c16.641,31.959) 17.1,31.959 ; 17.1,31.959 ccw(c17.559,31.959) 17.234,31.634 cw(c17.559,31.959) 17.1,31.959 ; J11.7@16.016,38.116 cw(c13.399,35.499) 17.1,35.499 ccw(c13.399,35.499) J11.7@16.016,38.116 ; J11.7@16.37,38.47 cw(c14.606,36.706) 17.1,36.706 ccw(c14.606,36.706) J11.7@16.37,38.47 ; 17.1,36.465 cw(c19.435,36.465) 17.784,38.116 ccw(c19.435,36.465) 17.1,36.465
INPUT15: J11.8 R66.2 | length 22.4
  Top Layer w0.5: R66.2@12,31.5 J11.8@12,39.1 ; 12,31.959 cw(c11.541,31.959) 11.866,31.634 ccw(c11.541,31.959) 12,31.959 ; 12,31.959 ccw(c12.459,31.959) 12.134,31.634 cw(c12.459,31.959) 12,31.959 ; J11.8@10.916,38.116 cw(c8.299,35.499) 12,35.499 ccw(c8.299,35.499) J11.8@10.916,38.116 ; J11.8@11.27,38.47 cw(c9.506,36.706) 12,36.706 ccw(c9.506,36.706) J11.8@11.27,38.47 ; 12,36.465 cw(c14.335,36.465) 12.684,38.116 ccw(c14.335,36.465) 12,36.465
INPUT16: J11.9 R67.2 | length 22.4
  Top Layer w0.5: R67.2@6.9,31.5 J11.9@6.9,39.1 ; 6.9,31.959 cw(c6.441,31.959) 6.766,31.634 ccw(c6.441,31.959) 6.9,31.959 ; 6.9,31.959 ccw(c7.359,31.959) 7.034,31.634 cw(c7.359,31.959) 6.9,31.959 ; J11.9@5.816,38.116 cw(c3.199,35.499) 6.9,35.499 ccw(c3.199,35.499) J11.9@5.816,38.116 ; J11.9@6.17,38.47 cw(c4.406,36.706) 6.9,36.706 ccw(c4.406,36.706) J11.9@6.17,38.47 ; 6.9,36.465 cw(c9.235,36.465) 7.584,38.116 ccw(c9.235,36.465) 6.9,36.465
NetD10_A: D10.A U10.2 | length 24.9
  Top Layer w0.2: D10.A@6.24,-16.115 U10.2@6.24,-11.9 ; 6.24,-14.119 cw(c7.809,-14.119) 6.7,-13.01 ccw(c7.809,-14.119) 6.24,-14.119 ; 6.24,-14.119 ccw(c4.671,-14.119) 5.78,-13.01 cw(c4.671,-14.119) 6.24,-14.119 ; 6.24,-13.636 cw(c7.326,-13.636) 6.558,-12.868 ccw(c7.326,-13.636) 6.24,-13.636 ; 6.24,-13.636 ccw(c5.154,-13.636) 5.922,-12.868 cw(c5.154,-13.636) 6.24,-13.636 ; D10.A@5.709,-15.584 ccw(c4.428,-14.303) 6.24,-14.303 cw(c4.428,-14.303) D10.A@5.709,-15.584 ; D10.A@5.851,-15.726 ccw(c4.911,-14.786) 6.24,-14.786 cw(c4.911,-14.786) D10.A@5.851,-15.726 ; 6.24,-15.1 ccw(c7.325,-15.1) 6.558,-15.867 cw(c7.325,-15.1) 6.24,-15.1 ; 6.24,-14.617 ccw(c7.808,-14.617) 6.699,-15.726 cw(c7.808,-14.617) 6.24,-14.617 ; 6.24,-14.134 ccw(c8.291,-14.134) 6.841,-15.584 cw(c8.291,-14.134) 6.24,-14.134
NetD10_K: D10.K R50.1 | length 25.2
  Top Layer w0.2: D10.K@6.275,-20.4 8.3,-20.4 ; R50.1@6.441,-29.888 cw(c6.976,-29.997) R50.1@6.835,-29.47 ; R50.1@6.5,-29.9 9.2,-27.2 9.2,-21.3 8.3,-20.4 ; R50.1@6.512,-29.959 ccw(c6.403,-29.424) R50.1@6.93,-29.565 ; 7.08,-29.32 cw(c6.5,-28.739) 6.5,-29.56 ccw(c6.5,-28.739) 7.08,-29.32 ; 7.08,-29.32 ccw(c7.661,-29.9) 6.84,-29.9 cw(c7.661,-29.9) 7.08,-29.32 ; 7.881,-20.4 cw(c7.881,-19.385) 7.092,-20.023 ccw(c7.881,-19.385) 7.881,-20.4 ; 7.881,-20.4 ccw(c7.881,-21.415) 7.092,-20.777 cw(c7.881,-21.415) 7.881,-20.4 ; 8.3,-20.4 cw(c8.3,-19.047) 7.247,-19.897 ccw(c8.3,-19.047) 8.3,-20.4 ; 8.3,-20.4 ccw(c8.3,-21.753) 7.247,-20.903 cw(c8.3,-21.753) 8.3,-20.4
NetD11_A: D11.A U11.2 | length 24.9
  Top Layer w0.2: D11.A@11.74,-16.115 U11.2@11.74,-11.9 ; 11.74,-14.119 cw(c13.309,-14.119) 12.2,-13.01 ccw(c13.309,-14.119) 11.74,-14.119 ; 11.74,-14.119 ccw(c10.171,-14.119) 11.28,-13.01 cw(c10.171,-14.119) 11.74,-14.119 ; 11.74,-13.636 cw(c12.826,-13.636) 12.058,-12.868 ccw(c12.826,-13.636) 11.74,-13.636 ; 11.74,-13.636 ccw(c10.654,-13.636) 11.422,-12.868 cw(c10.654,-13.636) 11.74,-13.636 ; D11.A@11.209,-15.584 ccw(c9.928,-14.303) 11.74,-14.303 cw(c9.928,-14.303) D11.A@11.209,-15.584 ; D11.A@11.351,-15.726 ccw(c10.411,-14.786) 11.74,-14.786 cw(c10.411,-14.786) D11.A@11.351,-15.726 ; 11.74,-15.1 ccw(c12.825,-15.1) 12.058,-15.867 cw(c12.825,-15.1) 11.74,-15.1 ; 11.74,-14.617 ccw(c13.308,-14.617) 12.199,-15.726 cw(c13.308,-14.617) 11.74,-14.617 ; 11.74,-14.134 ccw(c13.791,-14.134) 12.341,-15.584 cw(c13.791,-14.134) 11.74,-14.134
NetD11_K: D11.K R51.1 | length 27.9
  Top Layer w0.2: R51.1@11.17,-29.565 ccw(c11.697,-29.424) R51.1@11.588,-29.959 ; R51.1@11.265,-29.47 cw(c11.124,-29.997) R51.1@11.659,-29.888 ; R51.1@11.6,-29.9 10.5,-28.8 10.5,-23.7 11.775,-22.425 D11.K@11.775,-20.4 ; 11.02,-29.32 cw(c10.439,-29.9) 11.26,-29.9 ccw(c10.439,-29.9) 11.02,-29.32 ; 11.02,-29.32 ccw(c11.6,-28.739) 11.6,-29.56 cw(c11.6,-28.739) 11.02,-29.32 ; 11.775,-22.331 cw(c13.706,-22.331) 12.341,-20.966 ccw(c13.706,-22.331) 11.775,-22.331 ; 11.775,-22.331 ccw(c9.844,-22.331) 11.209,-20.966 cw(c9.844,-22.331) 11.775,-22.331 ; 11.775,-21.849 cw(c13.224,-21.849) 12.199,-20.824 ccw(c13.224,-21.849) 11.775,-21.849 ; 11.775,-21.849 ccw(c10.326,-21.849) 11.351,-20.824 cw(c10.326,-21.849) 11.775,-21.849 ; 11.775,-21.366 cw(c12.741,-21.366) 12.058,-20.683 ccw(c12.741,-21.366) 11.775,-21.366 ; 11.775,-21.366 ccw(c10.809,-21.366) 11.492,-20.683 cw(c10.809,-21.366) 11.775,-21.366
NetD12_A: D12.A U12.2 | length 24.9
  Top Layer w0.2: D12.A@17.24,-16.115 U12.2@17.24,-11.9 ; 17.24,-14.119 cw(c18.809,-14.119) 17.7,-13.01 ccw(c18.809,-14.119) 17.24,-14.119 ; 17.24,-14.119 ccw(c15.671,-14.119) 16.78,-13.01 cw(c15.671,-14.119) 17.24,-14.119 ; 17.24,-13.636 cw(c18.326,-13.636) 17.558,-12.868 ccw(c18.326,-13.636) 17.24,-13.636 ; 17.24,-13.636 ccw(c16.154,-13.636) 16.922,-12.868 cw(c16.154,-13.636) 17.24,-13.636 ; D12.A@16.709,-15.584 ccw(c15.428,-14.303) 17.24,-14.303 cw(c15.428,-14.303) D12.A@16.709,-15.584 ; D12.A@16.851,-15.726 ccw(c15.911,-14.786) 17.24,-14.786 cw(c15.911,-14.786) D12.A@16.851,-15.726 ; 17.24,-15.1 ccw(c18.325,-15.1) 17.558,-15.867 cw(c18.325,-15.1) 17.24,-15.1 ; 17.24,-14.617 ccw(c18.808,-14.617) 17.699,-15.726 cw(c18.808,-14.617) 17.24,-14.617 ; 17.24,-14.134 ccw(c19.291,-14.134) 17.841,-15.584 cw(c19.291,-14.134) 17.24,-14.134
NetD12_K: D12.K R52.1 | length 26
  Top Layer w0.2: R52.1@16.7,-29.9 16.7,-25.15 17.275,-24.575 D12.K@17.275,-20.4 ; 16.7,-29.079 cw(c15.879,-29.079) 16.46,-29.66 ccw(c15.879,-29.079) 16.7,-29.079 ; 16.7,-29.079 ccw(c17.521,-29.079) 16.94,-29.66 cw(c17.521,-29.079) 16.7,-29.079 ; 17.275,-22.331 cw(c19.206,-22.331) 17.841,-20.966 ccw(c19.206,-22.331) 17.275,-22.331 ; 17.275,-22.331 ccw(c15.344,-22.331) 16.709,-20.966 cw(c15.344,-22.331) 17.275,-22.331 ; 17.275,-21.849 cw(c18.724,-21.849) 17.699,-20.824 ccw(c18.724,-21.849) 17.275,-21.849 ; 17.275,-21.849 ccw(c15.826,-21.849) 16.851,-20.824 cw(c15.826,-21.849) 17.275,-21.849 ; 17.275,-21.366 cw(c18.241,-21.366) 17.558,-20.683 ccw(c18.241,-21.366) 17.275,-21.366 ; 17.275,-21.366 ccw(c16.309,-21.366) 16.992,-20.683 cw(c16.309,-21.366) 17.275,-21.366
NetD13_A: D13.A U13.2 | length 24.9
  Top Layer w0.2: D13.A@22.74,-16.115 U13.2@22.74,-11.9 ; 22.74,-14.119 cw(c24.309,-14.119) 23.2,-13.01 ccw(c24.309,-14.119) 22.74,-14.119 ; 22.74,-14.119 ccw(c21.171,-14.119) 22.28,-13.01 cw(c21.171,-14.119) 22.74,-14.119 ; 22.74,-13.636 cw(c23.826,-13.636) 23.058,-12.868 ccw(c23.826,-13.636) 22.74,-13.636 ; 22.74,-13.636 ccw(c21.654,-13.636) 22.422,-12.868 cw(c21.654,-13.636) 22.74,-13.636 ; D13.A@22.209,-15.584 ccw(c20.928,-14.303) 22.74,-14.303 cw(c20.928,-14.303) D13.A@22.209,-15.584 ; D13.A@22.351,-15.726 ccw(c21.411,-14.786) 22.74,-14.786 cw(c21.411,-14.786) D13.A@22.351,-15.726 ; 22.74,-15.1 ccw(c23.825,-15.1) 23.058,-15.867 cw(c23.825,-15.1) 22.74,-15.1 ; 22.74,-14.617 ccw(c24.308,-14.617) 23.199,-15.726 cw(c24.308,-14.617) 22.74,-14.617 ; 22.74,-14.134 ccw(c24.791,-14.134) 23.341,-15.584 cw(c24.791,-14.134) 22.74,-14.134
NetD13_K: D13.K R53.1 | length 20.8
  Top Layer w0.2: R53.1@21.741,-29.888 cw(c22.276,-29.997) R53.1@22.135,-29.47 ; R53.1@21.8,-29.9 24.4,-27.3 24.4,-23.4 22.775,-21.775 ; R53.1@21.812,-29.959 ccw(c21.703,-29.424) R53.1@22.23,-29.565 ; D13.K@22.775,-20.4 22.775,-21.775 ; 22.38,-29.32 cw(c21.8,-28.739) 21.8,-29.56 ccw(c21.8,-28.739) 22.38,-29.32 ; 22.38,-29.32 ccw(c22.961,-29.9) 22.14,-29.9 cw(c22.961,-29.9) 22.38,-29.32 ; 22.775,-21.775 cw(c23.557,-21.775) 23.17,-21.095 ccw(c23.557,-21.775) 22.775,-21.775 ; 22.775,-21.775 ccw(c21.993,-21.775) 22.38,-21.095 cw(c21.993,-21.775) 22.775,-21.775 ; 22.775,-21.431 cw(c23.361,-21.431) 23.072,-20.922 ccw(c23.361,-21.431) 22.775,-21.431 ; 22.775,-21.431 ccw(c22.189,-21.431) 22.479,-20.922 cw(c22.189,-21.431) 22.775,-21.431
NetD14_A: D14.A U14.2 | length 24.9
  Top Layer w0.2: D14.A@28.24,-16.115 U14.2@28.24,-11.9 ; 28.24,-14.119 cw(c29.809,-14.119) 28.7,-13.01 ccw(c29.809,-14.119) 28.24,-14.119 ; 28.24,-14.119 ccw(c26.671,-14.119) 27.78,-13.01 cw(c26.671,-14.119) 28.24,-14.119 ; 28.24,-13.636 cw(c29.326,-13.636) 28.558,-12.868 ccw(c29.326,-13.636) 28.24,-13.636 ; 28.24,-13.636 ccw(c27.154,-13.636) 27.922,-12.868 cw(c27.154,-13.636) 28.24,-13.636 ; D14.A@27.709,-15.584 ccw(c26.428,-14.303) 28.24,-14.303 cw(c26.428,-14.303) D14.A@27.709,-15.584 ; D14.A@27.851,-15.726 ccw(c26.911,-14.786) 28.24,-14.786 cw(c26.911,-14.786) D14.A@27.851,-15.726 ; 28.24,-15.1 ccw(c29.325,-15.1) 28.558,-15.867 cw(c29.325,-15.1) 28.24,-15.1 ; 28.24,-14.617 ccw(c29.808,-14.617) 28.699,-15.726 cw(c29.808,-14.617) 28.24,-14.617 ; 28.24,-14.134 ccw(c30.291,-14.134) 28.841,-15.584 cw(c30.291,-14.134) 28.24,-14.134
NetD14_K: D14.K R54.1 | length 22.2
  Top Layer w0.2: R54.1@26.47,-29.565 ccw(c26.997,-29.424) R54.1@26.888,-29.959 ; R54.1@26.565,-29.47 cw(c26.424,-29.997) R54.1@26.959,-29.888 ; R54.1@26.9,-29.9 25.6,-28.6 25.6,-21.3 26.5,-20.4 ; D14.K@28.275,-20.4 26.5,-20.4 ; 26.32,-29.32 cw(c25.739,-29.9) 26.56,-29.9 ccw(c25.739,-29.9) 26.32,-29.32 ; 26.32,-29.32 ccw(c26.9,-28.739) 26.9,-29.56 cw(c26.9,-28.739) 26.32,-29.32 ; 26.5,-20.4 cw(c26.5,-21.269) 27.242,-20.817 ccw(c26.5,-21.269) 26.5,-20.4 ; 26.5,-20.4 ccw(c26.5,-19.531) 27.242,-19.983 cw(c26.5,-19.531) 26.5,-20.4 ; 26.856,-20.4 cw(c26.856,-21.052) 27.413,-20.712 ccw(c26.856,-21.052) 26.856,-20.4 ; 26.856,-20.4 ccw(c26.856,-19.748) 27.413,-20.088 cw(c26.856,-19.748) 26.856,-20.4
NetD15_A: D15.A U15.2 | length 24.9
  Top Layer w0.2: D15.A@33.74,-16.115 U15.2@33.74,-11.9 ; 33.74,-14.119 cw(c35.309,-14.119) 34.2,-13.01 ccw(c35.309,-14.119) 33.74,-14.119 ; 33.74,-14.119 ccw(c32.171,-14.119) 33.28,-13.01 cw(c32.171,-14.119) 33.74,-14.119 ; 33.74,-13.636 cw(c34.826,-13.636) 34.058,-12.868 ccw(c34.826,-13.636) 33.74,-13.636 ; 33.74,-13.636 ccw(c32.654,-13.636) 33.422,-12.868 cw(c32.654,-13.636) 33.74,-13.636 ; D15.A@33.209,-15.584 ccw(c31.928,-14.303) 33.74,-14.303 cw(c31.928,-14.303) D15.A@33.209,-15.584 ; D15.A@33.351,-15.726 ccw(c32.411,-14.786) 33.74,-14.786 cw(c32.411,-14.786) D15.A@33.351,-15.726 ; 33.74,-15.1 ccw(c34.825,-15.1) 34.058,-15.867 cw(c34.825,-15.1) 33.74,-15.1 ; 33.74,-14.617 ccw(c35.308,-14.617) 34.199,-15.726 cw(c35.308,-14.617) 33.74,-14.617 ; 33.74,-14.134 ccw(c35.791,-14.134) 34.341,-15.584 cw(c35.791,-14.134) 33.74,-14.134
NetD15_K: D15.K R55.1 | length 26.5
  Top Layer w0.2: R55.1@32,-29.9 32,-24.2 33.775,-22.425 D15.K@33.775,-20.4 ; 32,-29.079 cw(c31.179,-29.079) 31.76,-29.66 ccw(c31.179,-29.079) 32,-29.079 ; 32,-29.079 ccw(c32.821,-29.079) 32.24,-29.66 cw(c32.821,-29.079) 32,-29.079 ; 33.775,-22.331 cw(c35.706,-22.331) 34.341,-20.966 ccw(c35.706,-22.331) 33.775,-22.331 ; 33.775,-22.331 ccw(c31.844,-22.331) 33.209,-20.966 cw(c31.844,-22.331) 33.775,-22.331 ; 33.775,-21.849 cw(c35.224,-21.849) 34.199,-20.824 ccw(c35.224,-21.849) 33.775,-21.849 ; 33.775,-21.849 ccw(c32.326,-21.849) 33.351,-20.824 cw(c32.326,-21.849) 33.775,-21.849 ; 33.775,-21.366 cw(c34.741,-21.366) 34.058,-20.683 ccw(c34.741,-21.366) 33.775,-21.366 ; 33.775,-21.366 ccw(c32.809,-21.366) 33.492,-20.683 cw(c32.809,-21.366) 33.775,-21.366
NetD16_A: D16.A U16.2 | length 25
  Top Layer w0.2: D16.A@39.24,-16.115 U16.2@39.24,-11.8 ; 39.24,-14.119 cw(c40.809,-14.119) 39.7,-13.01 ccw(c40.809,-14.119) 39.24,-14.119 ; 39.24,-14.119 ccw(c37.671,-14.119) 38.78,-13.01 cw(c37.671,-14.119) 39.24,-14.119 ; 39.24,-13.636 cw(c40.326,-13.636) 39.558,-12.868 ccw(c40.326,-13.636) 39.24,-13.636 ; 39.24,-13.636 ccw(c38.154,-13.636) 38.922,-12.868 cw(c38.154,-13.636) 39.24,-13.636 ; D16.A@38.709,-15.584 ccw(c37.428,-14.303) 39.24,-14.303 cw(c37.428,-14.303) D16.A@38.709,-15.584 ; D16.A@38.851,-15.726 ccw(c37.911,-14.786) 39.24,-14.786 cw(c37.911,-14.786) D16.A@38.851,-15.726 ; 39.24,-15.1 ccw(c40.325,-15.1) 39.558,-15.867 cw(c40.325,-15.1) 39.24,-15.1 ; 39.24,-14.617 ccw(c40.808,-14.617) 39.699,-15.726 cw(c40.808,-14.617) 39.24,-14.617 ; 39.24,-14.134 ccw(c41.291,-14.134) 39.841,-15.584 cw(c41.291,-14.134) 39.24,-14.134
NetD16_K: D16.K R56.1 | length 27.8
  Top Layer w0.2: R56.1@37.041,-29.888 cw(c37.576,-29.997) R56.1@37.435,-29.47 ; R56.1@37.1,-29.9 39.275,-27.725 D16.K@39.275,-20.4 ; R56.1@37.112,-29.959 ccw(c37.003,-29.424) R56.1@37.53,-29.565 ; 37.68,-29.32 cw(c37.1,-28.739) 37.1,-29.56 ccw(c37.1,-28.739) 37.68,-29.32 ; 37.68,-29.32 ccw(c38.261,-29.9) 37.44,-29.9 cw(c38.261,-29.9) 37.68,-29.32 ; 39.275,-22.331 cw(c41.206,-22.331) 39.841,-20.966 ccw(c41.206,-22.331) 39.275,-22.331 ; 39.275,-22.331 ccw(c37.344,-22.331) 38.709,-20.966 cw(c37.344,-22.331) 39.275,-22.331 ; 39.275,-21.849 cw(c40.724,-21.849) 39.699,-20.824 ccw(c40.724,-21.849) 39.275,-21.849 ; 39.275,-21.849 ccw(c37.826,-21.849) 38.851,-20.824 cw(c37.826,-21.849) 39.275,-21.849 ; 39.275,-21.366 cw(c40.241,-21.366) 39.558,-20.683 ccw(c40.241,-21.366) 39.275,-21.366 ; 39.275,-21.366 ccw(c38.309,-21.366) 38.992,-20.683 cw(c38.309,-21.366) 39.275,-21.366